# Altium PCB Mini-DIN6 Breakout.PcbDoc
Units mil, origin at the board's own origin, x right, y up, seen from the top; angles counter-clockwise.
Board outline 750 x 775 mil, 2 copper layers (Top Layer, Bottom Layer), stack 61.756 mil thick; 2 components, 7 nets, 16 pads, 2 vias.
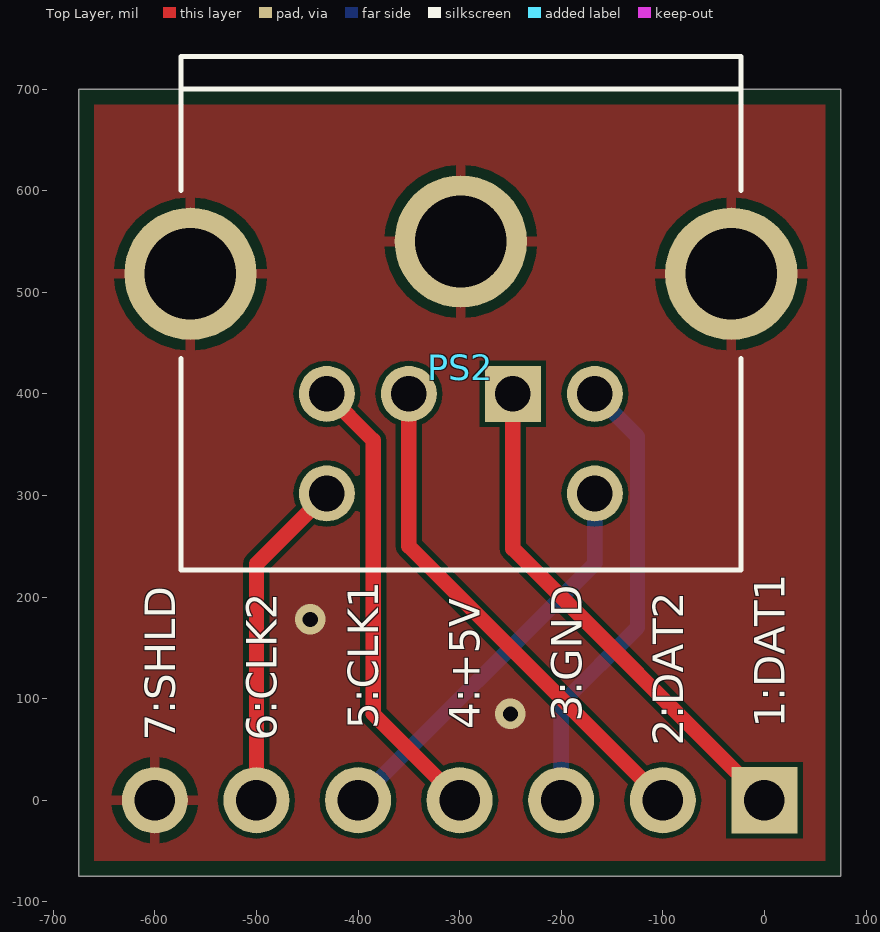
[diagram p0: Top Layer view]
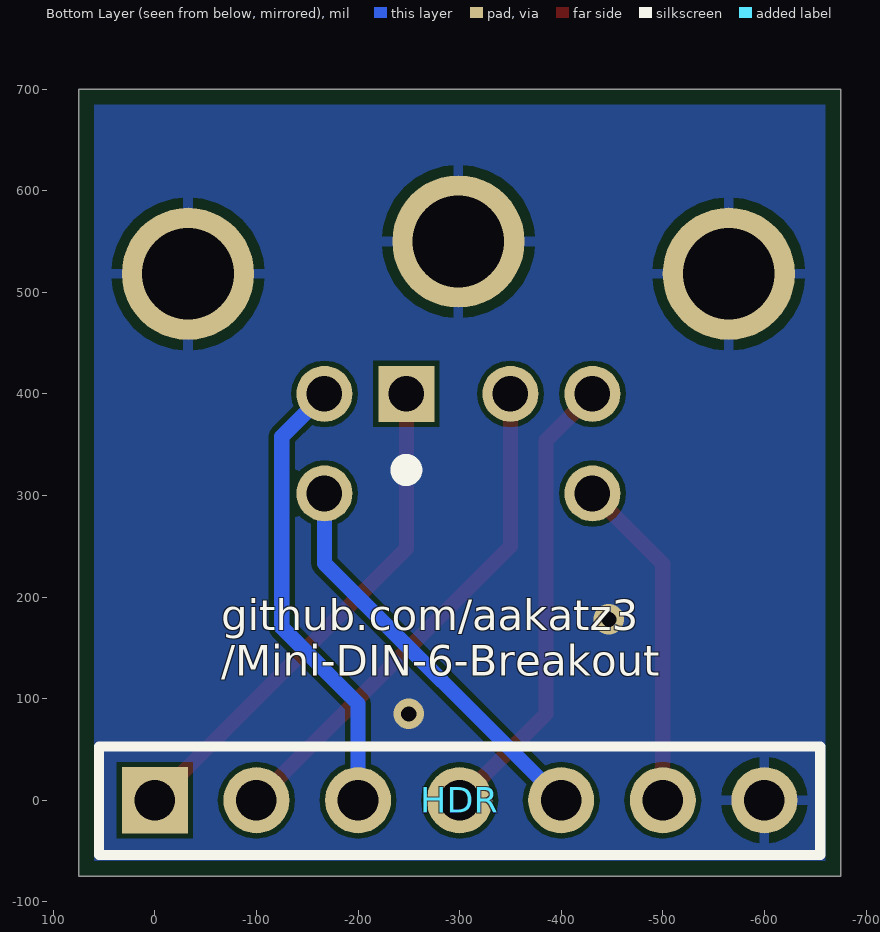
[diagram p1: Bottom Layer view, seen from below]

## Layer stack, top to bottom
Top Solder: solder mask 1, SM-001, Dk 4
Top Layer: signal copper 1.378
Dielectric 1: core 59, Core-043, Dk 4.3
Bottom Layer: signal copper 1.378
Bottom Solder: solder mask 1, SM-001, Dk 4

## Board outline
75,-75 75,700 -675,700 -675,-75

## Design rules (kind name [scope] priority, off if disabled: settings)
AcuteAngle [All] p1: minimum=6.00000000000000E+0001 checktracksonly=FALSE
AssemblyTestPointUsage [All] p1 off: allowmultiple=TRUE
AssemblyTestpoint OptionalTestpoint [All] p1: testpointundercomponent=TRUE minsize=40 maxsize=100 preferedsize=60 minholesize=0 maxholesize=40 preferedholesize=32 testpointgrid=1 usegrid=TRUE gridtolerance=0.01 allowsidetop=TRUE allowsidebottom=TRUE
AssemblyTestpoint [All] p2: testpointundercomponent=FALSE minsize=40 maxsize=100 preferedsize=60 minholesize=0 maxholesize=40 preferedholesize=32 testpointgrid=1 usegrid=TRUE gridtolerance=0.01 allowsidetop=TRUE allowsidebottom=TRUE
BoardOutlineClearance ComponentSilkOverhangs [InAnyComponent AND (OnBottomSilkscreen OR OnTopSilkscreen)] p1: gap=0 ignorepadtopadclearanceinfootprint=FALSE except(10: SMDPad-OutlineEdge SMDPad-CavityEdge SMDPad-CutoutEdge SMDPad-SplitBarrior SMDPad-SplitContinuation THPad-OutlineEdge THPad-CavityEdge THPad-CutoutEdge THPad-SplitBarrior THPad-SplitContinuation Via-OutlineEdge Via-CavityEdge Via-CutoutEdge Via-SplitBarrior Via-SplitContinuation)
BoardOutlineClearance [All] p2: gap=15 ignorepadtopadclearanceinfootprint=FALSE
Clearance [All] p1: gap=5 ignorepadtopadclearanceinfootprint=FALSE except(9.84: Arc-Hole Track-Hole SMDPad-Hole THPad-Hole Via-Hole Fill-Hole Poly-Hole Region-Hole Text-Hole)
ComponentClearance [All] p1: gap=5 collisioncheckmode=3 verticalgap=5 showdistances=TRUE
DiffPairsRouting [All] p1: maxlimit=10 minlimit=5 mostfreqgap=5 toplayer_minwidth=5 toplayer_maxwidth=1000 toplayer_prefwidth=5 bottomlayer_minwidth=5 bottomlayer_maxwidth=1000 bottomlayer_prefwidth=5 maxuncoupledlength=500
FabricationTestPointUsage [All] p1: valid=0 allowmultiple=TRUE
Height "Free Bodies" [IsFree] p1 off: minheight=0 maxheight=20000 prefheight=500
Height "Topside Height" [OnTop] p2 off: minheight=0 maxheight=5000 prefheight=500
Height "Bottomside Height" [OnBottom] p3 off: minheight=0 maxheight=150 prefheight=100
Height [All] p4 off: minheight=0 maxheight=71497.94 prefheight=500
HoleSize [All] p1: absolutevalues=TRUE maxlimit=250 minlimit=8 maxpercent=100.000 minpercent=20.000
HoleToHoleClearance [All] p1: gap=10 allowstackedmicrovias=FALSE
MinimumAnnularRing [All] p1: minimumring=5
MinimumSolderMaskSliver [All] p1: minsoldermaskwidth=3
PasteMaskExpansion "THT Paste Disable (force)" [IsThruPin] p1 off: expansion=-99999
PasteMaskExpansion [All] p2: expansion=0
PermittedLayers THTTopOnly [IsThruComponent] p1 off: toplayerpermitted=TRUE bottomlayerpermitted=FALSE
PermittedLayers THTBotOnly [IsThruComponent] p2 off: toplayerpermitted=FALSE bottomlayerpermitted=TRUE
PermittedLayers SMDTopOnly [NOT IsTestpoint AND IsSMTComponent] p3 off: toplayerpermitted=TRUE bottomlayerpermitted=FALSE
PermittedLayers SMDBotOnly [NOT IsTestpoint AND IsSMTComponent] p4 off: toplayerpermitted=FALSE bottomlayerpermitted=TRUE
PlaneClearance [All] p1: clearance=5
PlaneConnect PlaneConnectPowerPads [InPadClass('PowerPads')] p1: planeconnectstyle=Direct reliefexpansion=20 reliefentries=4 reliefconductorwidth=10 reliefairgap=10
PlaneConnect [All] p2: pad.planeconnectstyle=Relief pad.reliefexpansion=11.81 pad.reliefentries=4 pad.reliefconductorwidth=5 pad.reliefairgap=5 via.planeconnectstyle=Direct via.reliefexpansion=11.81 via.reliefentries=4 via.reliefconductorwidth=5 via.reliefairgap=5
PolygonConnect PolyAvoidConnect [InPadClass('PowerPadAvoidPoly')] p1: connectstyle=NoConnect reliefconductorwidth=10 reliefentries=4 polygonreliefangle="90 Angle" airgapwidth=15
PolygonConnect DirectConnectPads [InPadClass('DirectConnect')] p2: connectstyle=Direct reliefconductorwidth=5 reliefentries=4 polygonreliefangle="90 Angle" airgapwidth=5
PolygonConnect PolygonConnectPowerPads [InPolygonClass('PowerPolys') vs (InPadClass('PowerPads'))] p3: connectstyle=Direct reliefconductorwidth=10 reliefentries=4 polygonreliefangle="90 Angle" airgapwidth=10
PolygonConnect PowerPolyConnect [InPolygonClass('PowerPolys')] p4: thpad.connectstyle=Relief thpad.reliefconductorwidth=15 thpad.reliefentries=4 thpad.polygonreliefangle="90 Angle" thpad.airgapwidth=15 smdpad.connectstyle=Relief smdpad.reliefconductorwidth=10 smdpad.reliefentries=4 smdpad.polygonreliefangle="90 Angle" smdpad.airgapwidth=12 via.connectstyle=Direct via.reliefconductorwidth=10 via.reliefentries=4 via.polygonreliefangle="90 Angle" via.airgapwidth=10
PolygonConnect [All] p5: thpad.connectstyle=Relief thpad.reliefconductorwidth=10 thpad.reliefentries=4 thpad.polygonreliefangle="90 Angle" thpad.airgapwidth=10 smdpad.connectstyle=Relief smdpad.reliefconductorwidth=10 smdpad.reliefentries=4 smdpad.polygonreliefangle="90 Angle" smdpad.airgapwidth=10 via.connectstyle=Direct via.reliefconductorwidth=10 via.reliefentries=4 via.polygonreliefangle="90 Angle" via.airgapwidth=10
RoutingVias [All] p1: holewidth=10 width=20 viastyle="Through Hole" minholewidth=8 minwidth=16 maxholewidth=50 maxwidth=100
SilkToSilkClearance [All] p1: silktosilkclearance=5
SolderMaskExpansion "Tented Vias" [IsVia and Not IsTestpoint] p1: expansion=4 istentingtop=TRUE
SolderMaskExpansion [All] p2: expansion=3 istentingtop=FALSE
Width [All] p1: maxlimit=1000 minlimit=5 preferedwidth=10 minimp=50.000000 maximp=50.000000 favimp=50.000000
17 further rules are at their usual default settings.

## Components (designator, comment, footprint, x,y, rotation, side; value= is the part's Value field where it differs from the comment)
HDR "7 contacts Male header" PH1-07-UA -300,0 r180 bottom
PS2 "Mini DIN-6" 5749180-1 -298.82,550 r180 top

## Footprints (in the part's own frame and the unit in brackets; to place one, negate y for a bottom-side part, rotate by r counter-clockwise, add the part's x,y. Pads: shape width x height; smd on the part's side, far side on the other; paste and mask are expansions set on the pad)
5749180-1 [mm]
  rect 1.398x1.398 hole 0.89: 1(-1.3,3.81)
  round 1.398 hole 0.89: 2(1.3,3.81) 3(-3.35,3.81) 4(3.35,3.81) 5(-3.35,6.3) 6(3.35,6.3)
  round 3.306 hole 2.29: S1(0,0) S2(6.76,0.81) S3(-6.76,0.81)
  silkscreen extent -7,-4.62 7,8.21, body extent -6.99,-4.7 6.99,8.13, height 13.05
PH1-07-UA [mil]
  rect 65x65 hole 40: 1(-300,0)
  round 65 hole 40: 2(-200,0) 3(-100,0) 4(0,0) 5(100,0) 6(200,0) 7(300,0)
  silkscreen extent -355,-54 355,53, body extent -350,-49 350,49, height 335

## Part data
HDR: library part PH1-07-UA, "Connector Male Header 1X7 7contacts 0.100in pitch Gold Flash", Manufacturer="Adam Tech", PCB Package="1x7 THT", Supplier Part Number 1=2057-PH1-07-UA-ND, ComponentLink1Description="Manufacturer Website", ComponentLink1URL=http://www.adam-tech.com/, ComponentLink2Description="Component Datasheet", ComponentLink2URL=http://www.adam-tech.com/downloader.php?p=PH1-XX-UA.pdf, ComponentLink3Description="Octopart Link", ComponentLink3URL=https://octopart.com/ph1-06-ua-adam+tech-7873156?r=sp, Contact Finish=Gold, Description in Visual="Con Hdr Male 7contacts vertical 1x7", Gender=Male, Manufacturer P/N=PH1-07-UA, Number of Contacts=7, Number of Rows=1, Orientation=vertical, P/N=PH1-07-UA, Pitch=0.100in, Supplier 1=Digi-Key, Supplier 2=Digi-Key, Supplier Part Number 2=732-5320-ND
PS2: library part 5749180-1, "6 Position Circular Connector Receptacle, Female Sockets Solder, Mini-DIN 6", Manufacturer="Tyco Electronics", Supplier Part Number 1=5749180-1-ND, Connector Mount="PCB Mount, Right Angle", Description in Visual="CONN RCPT FMALE MINI DIN 6P SLDR", Finish=Gold, Gender=Socket, Manufacturer P/N=5749180-1, Material="Thermoplastic with Shield", Number of Contacts=6, P/N=5749180-1, PCB Package=5749180-1, Polarization=Y, Shell Size=Mini-Din, Supplier 1=Digi-Key

## Via types
v1: diameter 30, hole 15, Top Layer to Bottom Layer, tented both sides, 2 vias

## Nets (pads, with @x,y where several pads share a name; then routed paths per layer and width w, separated by ;. In a path a pad name is that pad's centre, name@x,y a point inside that pad or via, vN(x,y) a via of type N, cw(c..) or ccw(c..) an arc to the next point about the centre after c; other vN are vias at no path point)
1: HDR.1 PS2.1 | length 502.6
  Top Layer w15: PS2.1 -247.64,247.64 HDR.1
2: HDR.2 PS2.2 | length 503.6
  Top Layer w15: PS2.2 -350,250 HDR.2
3: HDR.3 PS2.3 | length 448.4
  Bottom Layer w15: HDR.3 -200,95 -125,170 -125,358.07 PS2.3
4: HDR.4 PS2.4 | length 454.1
  Top Layer w15: PS2.4 -385,354.29 -385,85 HDR.4
5: HDR.5 PS2.5 | length 398.5
  Bottom Layer w15: HDR.5 -166.93,233.07 PS2.5
6: HDR.6 PS2.6 | length 330.7
  Top Layer w15: HDR.6 -500,232.68 PS2.6
SHELL: HDR.7 PS2.S1 PS2.S2 PS2.S3
  other v1: -250,85 -447,178

## Polygon pours and split planes (outlines as drawn)
SHELL on Top Layer "SHELL_L01_P002" (solid, remove dead copper, pour order 2): 75,-75 75,700 -675,700 -675,-75
SHELL on Bottom Layer "SHELL_L02_P003" (solid, remove dead copper, pour order 3): 75,-75 75,700 -675,700 -675,-75

## Silkscreen, mask and mechanical layers (free items; w line width, h text height)
Top Overlay:
  text "3:GND" at -180,77.31 h30 r90
  text "1:DAT1" at 20,71.31 h30 r90
  text "5:CLK1" at -380,69.74 h30 r90
  text "4:+5V" at -280,69.74 h30 r90
  text "7:SHLD" at -580,58.46 h30 r90
  text "6:CLK2" at -480,58.46 h30 r90
  text "2:DAT2" at -80,53.74 h30 r90
Bottom Overlay:
  text "github.com/aakatz3 / /Mini-DIN-6-Breakout" at -65.41,122.44 h30
Board Outline:
  the board outline again, w10
CAM Title Block:
  drawing of 59 lines, arcs and shapes, not listed
  text "1" at -564.29,7311.6 h48.36
  text "2" at 2178.83,7311.6 h48.36
  text "3" at 4931.96,7311.6 h48.36
  text "4" at 7677.58,7311.6 h48.36
  text "A" at -1837.46,6349.46 h48.36
  text "A" at 8963.26,6349.46 h48.36
  text "B" at -1832.46,4224.25 h48.36
  text "B" at 8967.43,4224.25 h48.36
  text "C" at -1833.3,2099.88 h48.36
  text "C" at 8966.6,2099.88 h48.36
  text "D" at -1835.8,-25.33 h48.36
  text "D" at 8964.1,-25.33 h48.36
  text "Title:" at 5374.69,-106.2 h65.87
  text "'.Pcb_File_Name_No_Path'" at 5724.88,-127.32 h63.36
  text "*" at 5624.83,-220.42 h32.52
  text "*" at 5624.83,-280.45 h32.52
  text "Desc:" at 5374.69,-292.96 h42.52
  text "*" at 5624.83,-340.48 h32.52
  text "Letter" at 5574.8,-488.06 h42.52
  text "Auth:" at 5975.01,-488.06 h42.52
  text "Proj:" at 7074.76,-488.06 h42.52
  text "Size:" at 5374.69,-493.06 h42.52
  text ".ProjAuth" at 6225.14,-509.5 h42.52
  text ".ProjShrtName" at 7275.5,-509.5 h42.52
  text "1" at 7374.92,-627.71 h37.52
  text "1" at 7675.08,-627.71 h37.52
  text "Date:" at 5374.69,-633.96 h37.52
  text "'.ModifiedDate'" at 5624.83,-633.96 h37.52
  text "Time:" at 6375.22,-633.96 h37.52
  text "'.ModifiedTime'" at 6585.34,-633.96 h37.52
  text "Sheet" at 7074.76,-633.96 h37.52
  text "of" at 7525,-633.96 h37.52
  text ".ProjGitURL" at 5625.5,-712 h37.52
  text "Repo:" at 5374.69,-724 h37.52
  text "File:" at 5374.69,-824.05 h37.52
  text "'.Pcb_File_Name'" at 5624.83,-824.05 h37.52
  text "1" at -564.29,-987.47 h48.36
  text "2" at 2178.83,-987.47 h48.36
  text "3" at 4931.96,-987.47 h48.36
  text "4" at 7677.58,-987.47 h48.36

## Text inside footprints (layer, text, board x,y; h text height)
PS2: Designer Notes "PCB EDGE" at 296.18,720 h40.04 r180